# EAGLE board heartrate_v2 (EAGLE 7.4.0)
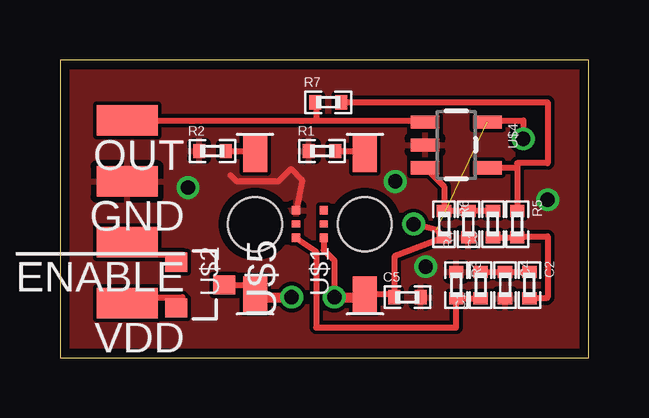
[diagram p0: board, top side]
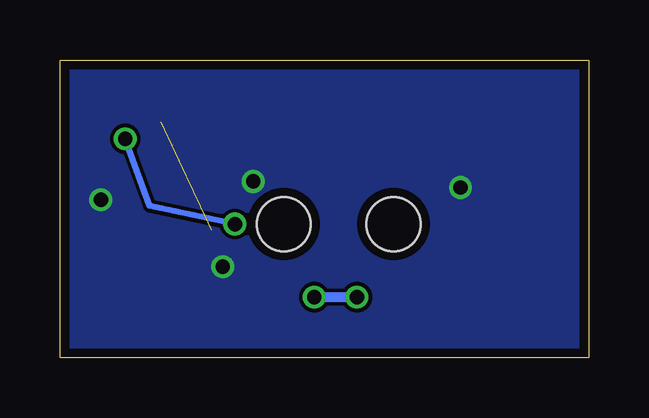
[diagram p1: board, bottom side, seen from below]

Size 22.02 x 12.44 mm. Coordinates in mm from the lower left corner, seen from the top.
Outline: 0,0 22.02,0 22.02,12.44 0,12.44 0,0
Copper layers (1*16): Top 0.0356mm / dielectric 1.5011mm / Bottom 0.0356mm
Design rules "oshpark-2layer": minimum track width 6mil, minimum drill 13mil, track to track 6mil, track to pad 6mil, pad to pad 6mil, via to via 6mil, smd to smd 6mil, copper to edge 15mil, drill to drill 6mil, minimum pad ring 7mil, minimum via ring 7mil, stop-mask expansion 4mil, vias tented up to drill 0mil, thermal gap 10mil

## Footprints (pad centres in the part's own frame; a part is rotated, then mirrored left to right if it is on the bottom)
SMD1,27-2,54 = smd 1.27 x 2.54: 1 0,0
0402 = smd 0.5 x 0.6: 1 -0.55,0; 2 0.55,0
DSAH3717 = smd 1.5 x 1: G 2.925,0; V -2.925,0 | hole 2.25: 0,0
APDS-9008 = smd 0.35 x 0.35: GND -0.575,-0.575; OUT 0.575,-0.575; P$6 -0.575,0.575; VCC 0.575,0.575 | smd 0.3 x 0.35: P$1 0,0.575; P$2 0,-0.575
SOT23-5 = smd 0.55 x 1.2: VDD -0.95,1.3; VIN+ 0.95,-1.3; VIN- 0.95,1.3; VOUT -0.95,-1.3; VSS 0,-1.3
SOT23-3 = smd 0.8 x 0.9: 1 -0.95,-1; 2 0.95,-1; 3 0,1

## Placement (x,y rotation side)
!ENABLE  [SMD1,27-2,54]  2.79,4.83 90 top
C1  4.7uF  [0402]  17.53,3.05 90 top
C2  4.7uF  [0402]  19.56,3.05 270 top
C3  2.2uF  [0402]  18.03,5.59 90 top
C4  4.7uF  [0402]  18.54,3.05 270 top
C5  2.2uF  [0402]  14.48,2.54 0 top
GND  [SMD1,27-2,54]  2.79,7.37 90 top
OUT  [SMD1,27-2,54]  2.79,9.91 90 top
R1  715  [0402]  10.92,8.64 0 top
R2  715  [0402]  6.35,8.64 0 top
R3  12k  [0402]  16.51,3.05 270 top
R4  100k  [0402]  17.02,5.59 90 top
R5  10k  [0402]  19.05,5.59 270 top
R6  100k  [0402]  16,5.59 270 top
R7  3.3M  [0402]  11.18,10.67 0 top
U$1  DSAH3717  [DSAH3717]  12.7,5.59 90 top
U$2  DSAH3717  [DSAH3717]  8.13,5.59 90 top
U$3  APDS-9008  [APDS-9008]  10.41,5.59 270 top
U$4  MCP6001  [SOT23-5]  16.51,8.89 270 top
U$5  P-CHANNEL-MOSFET  [SOT23-3]  5.84,3.05 270 top
VDD  [SMD1,27-2,54]  2.79,2.29 90 top

## Library data of the parts
!ENABLE GND OUT VDD = wirepad
C1-C5 R1-R7 = standardparts
U$1-U$4 = MedStatCustom
U$5 = GeekAmmo

## Nets
GND: C4.2 C5.2 GND.1 R1.1 R2.1 R3.1 R4.1 U$3.GND U$4.VSS
N$1: R1.2 U$1.G
N$2: U$5.2 VDD.1
N$3: !ENABLE.1 U$5.1
N$4: R2.2 U$2.G
N$5: C1.1 R3.2 U$3.OUT
N$6: C1.2 C2.1 C4.1
N$7: C2.2 C3.1 R5.2
N$10: C3.2 R4.2 R6.1 U$4.VIN+
N$12: R5.1 R7.2 U$4.VIN-
OUT: OUT.1 R7.1 U$4.VOUT
VDD: C5.1 R6.2 U$1.V U$2.V U$3.VCC U$4.VDD U$5.3

## Tracks (layer width: path | path; a pad name or v marks a point on that pad's centre or on a via)
GND  (via drill 0.6)
  Top 0.254: 2.79,7.87 GND.1 2.79,7.11 | 7.11,7.62 7.37,7.37 9.1,7.37 9.61,7.87 9.65,7.87 10.09,7.43 U$3.GND
  other vias: 5.33,7.11 15.24,3.81 13.97,7.37 20.32,6.6
  pour Top: -0.51,12.95 22.1,12.95 22.1,-0.76 -0.51,-0.76
  pour Bottom: 0,12.7 -0.25,-0.51 21.59,-0.51 21.84,12.7
N$1
  Top 0.254: R1.2 12.7,8.64 U$1.G
N$2
  Top 0.254: VDD.1 2.54,2.29 2.54,2.54 5.1,2.54 U$5.2
N$3
  Top 0.254: !ENABLE.1 2.79,4.32 5.1,4.32 U$5.1
N$4
  Top 0.254: R2.2 8.13,8.64 U$2.G
N$5
  Top 0.254: U$3.OUT 10.67,4.44 10.67,1.27 16.51,1.27 R3.2 16.51,2.54 16.55,2.5 C1.1
N$6
  Top 0.254: C1.2 C4.1 C2.1
N$7
  Top 0.254: C3.1 R5.2 19.09,5.08 20.32,5.08 20.32,2.54 20.28,2.5 C2.2
N$10
  Top 0.254: C3.2 R4.2 R6.1 16,7.15 U$4.VIN+
N$12
  Top 0.254: U$4.VIN- 19.05,7.94 | 19.05,7.94 19.05,7.87 R5.1 | R7.2 20.32,10.67 20.32,8.13 19.05,8.13 19.05,7.94
N$17  (via drill 0.6)
  Bottom 0.254: v14.73,5.59 18.29,6.35 v19.3,9.14
OUT
  Top 0.254: R7.1 10.67,10.63 10.67,9.91 | 10.67,9.91 15.14,9.91 U$4.VOUT | OUT.1 10.67,9.91
VDD  (via drill 0.6)  (1 unrouted)
  Top 0.254: U$1.V 13.8,2.66 C5.1 13.93,4.23 R6.2 15.71,5.33 14.73,5.59 | U$4.VDD 17.88,9.91 19.3,9.91 19.3,9.14 | U$5.3 7.74,3.05 U$2.V 8.13,2.54 | U$3.VCC 10.99,4.5 11.43,4.06 v11.43,2.54
  Top 0.406: U$2.V 8.25,2.54 v9.65,2.54 | v11.43,2.54 12.58,2.54 U$1.V
  Bottom 0.406: v9.65,2.54 v11.43,2.54